# EAGLE board LAN_WIZ_V0.1 (EAGLE 6.4)
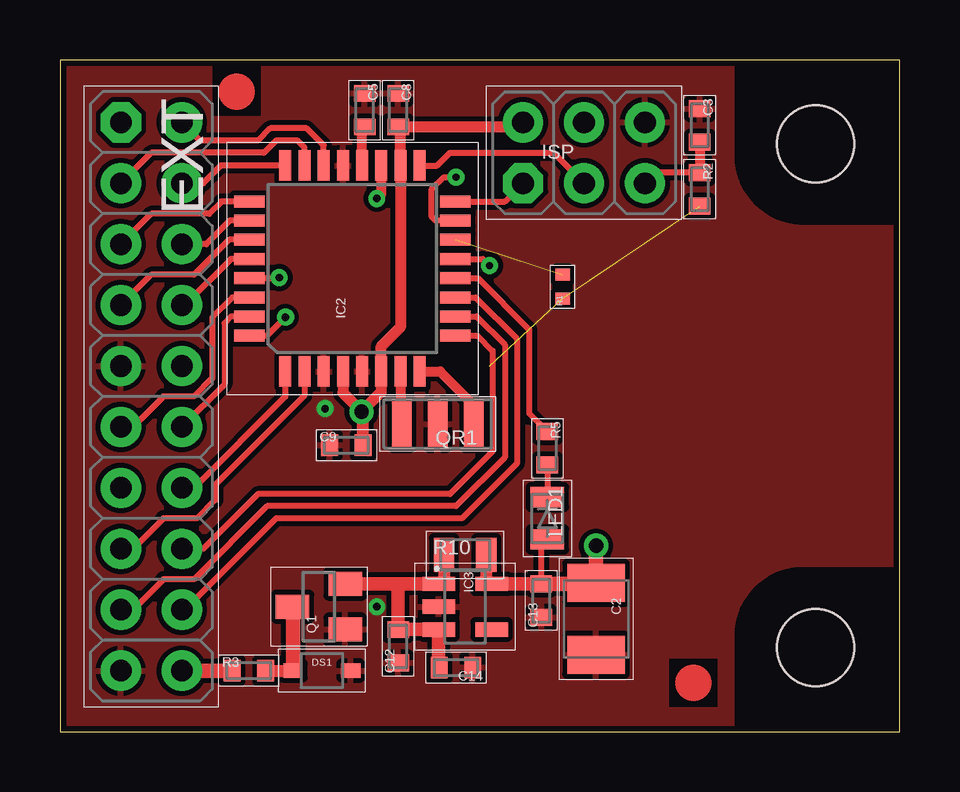
[diagram p0: board, top side]
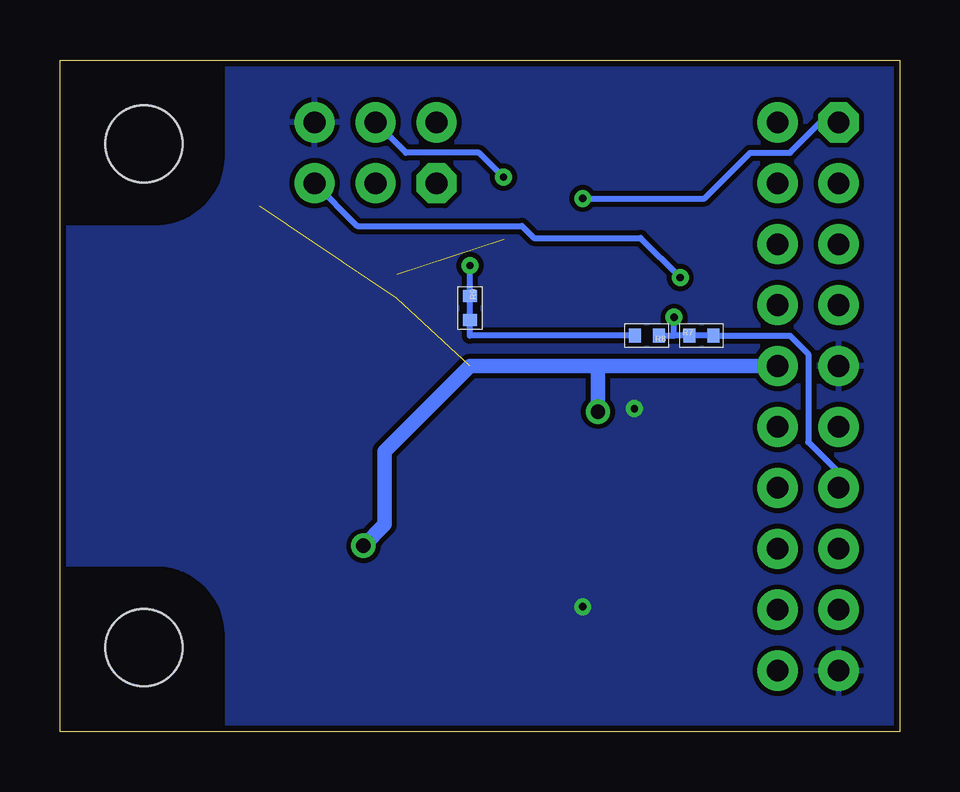
[diagram p1: board, bottom side, seen from below]

Size 35 x 28 mm. Coordinates in mm from the lower left corner, seen from the top.
Outline: 0,0 35,0 35,28 0,28 0,0
Copper layers (1*16): Top 0.035mm / dielectric 1.5mm / Bottom 0.035mm
Design rules "default *": minimum track width 10mil, minimum drill 0.3mm, track to track 8mil, track to pad 8mil, pad to pad 8mil, via to via 8mil, smd to smd 8mil, copper to edge 10mil, drill to drill 8mil, minimum pad ring 5mil, minimum via ring 8mil, stop-mask expansion 4mil, vias tented up to drill 25mil, thermal gap 8mil
Holes 3.2 mm at 31.5,24.5 31.5,3.5

## Footprints (pad centres in the part's own frame; a part is rotated, then mirrored left to right if it is on the bottom)
SMC_B = smd 1.6 x 2.4: + -1.5,0; - 1.5,0
0603 = smd 0.7 x 0.9: 1 -0.697,0; 2 0.697,0
SOD323 = smd 0.8 x 0.6: A 1.2,0; C -1.2,0
ML20S = drill 0.9 pad 1.676 octagon: 1 -11.43,-1.27 | drill 0.9 pad 1.676: 2 -11.43,1.27; 3 -8.89,-1.27; 4 -8.89,1.27; 5 -6.35,-1.27; 6 -6.35,1.27; 7 -3.81,-1.27; 8 -3.81,1.27; 9 -1.27,-1.27; 10 -1.27,1.27; 11 1.27,-1.27; 12 1.27,1.27; 13 3.81,-1.27; 14 3.81,1.27; 15 6.35,-1.27; 16 6.35,1.27; 17 8.89,-1.27; 18 8.89,1.27; 19 11.43,-1.27; 20 11.43,1.27
TQFP32-08 = smd 1.27 x 0.5: 1 -4.293,2.8; 2 -4.293,2; 3 -4.293,1.2; 4 -4.293,0.4; 5 -4.293,-0.4; 6 -4.293,-1.2; 7 -4.293,-2; 8 -4.293,-2.8; 17 4.293,-2.8; 18 4.293,-2; 19 4.293,-1.2; 20 4.293,-0.4; 21 4.293,0.4; 22 4.293,1.2; 23 4.293,2; 24 4.293,2.8 | smd 0.5 x 1.27: 9 -2.8,-4.293; 10 -2,-4.293; 11 -1.2,-4.293; 12 -0.4,-4.293; 13 0.4,-4.293; 14 1.2,-4.293; 15 2,-4.293; 16 2.8,-4.293; 25 2.8,4.293; 26 2,4.293; 27 1.2,4.293; 28 0.4,4.293; 29 -0.4,4.293; 30 -1.2,4.293; 31 -2,4.293; 32 -2.8,4.293
SOT23-5 = smd 0.6 x 1.35: 1 -0.95,-1.101; 2 0,-1.101; 3 0.95,-1.101; 4 0.95,1.101; 5 -0.951,1.101
ML6S = drill 0.9 pad 1.676 octagon: 1 -2.54,-1.27 | drill 0.9 pad 1.676: 2 -2.54,1.27; 3 0,-1.27; 4 0,1.27; 5 2.54,-1.27; 6 2.54,1.27
0805 = smd 0.85 x 1.4: A 0.88,0; C -0.88,0
SOT23 = smd 1 x 1.4: 1 -0.95,-1.1; 2 0.95,-1.1; 3 0,1.1
CR = smd 0.8 x 2: 1 -1.5,0; 2 1.5,0; M 0,0
0402 = smd 0.5 x 0.6: 1 -0.5,0; 2 0.5,0
0805' = smd 0.85 x 1.4: 1 -0.88,0; 2 0.88,0

## Placement (x,y rotation side)
C2  10u  [SMC_B]  22.35,4.7 270 top
C3  100n  [0603]  26.67,25.27 270 top
C5  100n  [0603]  12.7,25.91 270 top
C8  100n  [0603]  14.1,25.91 270 top
C9  100n  [0603]  11.94,11.94 0 top
C12  1u  [0603]  14.1,3.56 90 top
C13  1u  [0603]  20.07,5.46 90 top
C14  100n  [0603]  16.51,2.67 180 top
DS1  PESD12VL1BA  [SOD323]  10.92,2.54 0 top
EXT  EXT  [ML20S]  3.81,13.97 270 top
IC2  MEGA328P-AU  [TQFP32-08]  12.19,19.3 90 top
IC3  LP2992-IM5-3.3  [SOT23-5]  16.89,5.21 270 top
ISP  ISP  [ML6S]  21.84,24.13 0 top
LED1  LEDR  [0805]  20.32,8.89 90 top
Q1  IRLML9301  [SOT23]  10.79,5.21 90 top
QR1  8M  [CR]  15.75,12.83 180 top
R1  10k  [0402]  20.95,18.54 90 top
R2  10k  [0603]  26.67,22.61 270 top
R3  0R  [0603]  7.87,2.54 0 top
R5  330R  [0603]  20.32,11.81 270 top
R7  [0402]  8.26,16.51 0 bottom
R8  [0402]  10.54,16.51 180 bottom
R9  [0402]  17.91,17.65 270 bottom
R10  n.b.  [0805']  16.89,7.37 0 top
U$1  [FUICIDAL1.5]  26.42,2.03 0 top
U$2  [FUICIDAL1.5]  7.37,26.67 0 top

## Library data of the parts
C2 C3 C5 C8 C9 C12-C14 R1-R3 R5 R7-R10 = RCL
DS1 = Diode
EXT ISP = Conn
IC2 = atmel
IC3 = DCDC
LED1 = Optic
Q1 = Transistor
QR1 = QUARTZ
U$1 U$2 = Other

## Nets
+3V3: C2.+ C8.2 C9.2 C13.2 EXT.10 IC2.4 IC2.6 IC2.18 IC3.5 ISP.2 LED1.C R1.1 R2.2 R10.2
GND: C2.- C3.1 C5.1 C8.1 C9.1 C12.1 C13.1 C14.1 DS1.A EXT.9 EXT.19 IC2.3 IC2.5 IC2.21 IC3.2 ISP.6 Q1.1 QR1.M
MISO: IC2.16 ISP.1
MOSI: IC2.15 ISP.4
N$3: EXT.2 IC2.22
N$5: DS1.C Q1.3 R3.2
N$6: C5.2 IC2.20
N$7: IC2.8 QR1.1
N$8: IC2.7 QR1.2
N$9: EXT.20 R3.1
N$10: IC2.12 R5.1
N$11: EXT.13 IC2.32 R7.1 R7.2 R8.1
N$12: C12.2 C14.2 IC3.1 IC3.3 Q1.2 R10.1
N$15: EXT.1 IC2.19
N$21: LED1.A R5.2
PC0: EXT.3 IC2.23
PC1: EXT.4 IC2.24
PC2: EXT.5 IC2.25
PC3: EXT.6 IC2.26
PC4: EXT.7 IC2.27
PC5: EXT.8 IC2.28
PD3: EXT.14 IC2.1
PD4: EXT.15 IC2.2
PD5: EXT.16 IC2.9
PD6: EXT.17 IC2.10
PD7: EXT.18 IC2.11
RIRQ: IC2.13 R8.2 R9.1 R9.2
RSEL: IC2.14 R1.2
RST: C3.2 IC2.29 ISP.5 R2.1
RXD: EXT.11 IC2.30
SCK: IC2.17 ISP.3
TXD: EXT.12 IC2.31

## Tracks (layer width: path | path; a pad name or v marks a point on that pad's centre or on a via)
+3V3  (via drill 0.6)  (2 unrouted)
  Top 0.254: C13.2 20.07,7.76 LED1.C
  Top 0.457: ISP.2 19.11,25.21 C8.2 14.19,25.12 IC2.18 14.19,16.86 13.39,16.06 IC2.6 13.39,14.15 v12.57,13.34 11.79,14.12 IC2.4
  Top 0.508: C9.2 12.63,13.27 v12.57,13.34 | R10.2 17.77,6.38 IC3.5
  Top 0.559: IC3.5 C13.2
  Top 0.61: C13.2 22.31,6.16 C2.+ v22.35,7.75
  Bottom 0.61: 12.57,15.24 17.91,15.24 21.46,11.68 21.46,8.64 v22.35,7.75 | 12.57,15.24 EXT.10 | v12.57,13.34 12.57,15.24
GND  (via drill 0.3)
  other vias: 11.05,13.46 13.21,5.21
  pour Top: 0,0 28,0 28,4 arc-90 31,7 35,7 35,21 31,21 arc-90 28,24 28,28 0,28
  pour Bottom: 0,0 28,0 28,4 arc-90 31,7 35,7 35,21 31,21 arc-90 28,24 28,28 0,28
MISO
  Top 0.254: IC2.16 18.55,22.1 ISP.1
MOSI  (via drill 0.3)
  Top 0.254: IC2.15 15.65,21.3 15.49,21.46 15.49,22.61 16,23.11 v16.51,23.11
  Bottom 0.254: v16.51,23.11 17.53,24.13 20.57,24.13 ISP.4
N$3
  Top 0.254: IC2.22 10.99,24.44 10.29,25.15 8.76,25.15 8.26,24.64 5.84,24.64 EXT.2
N$5
  Top 0.508: R3.2 DS1.C
  Top 0.61: DS1.C 9.72,5.18 Q1.3
N$6
  Top 0.406: IC2.20 12.59,25.1 C5.2
N$7
  Top 0.406: IC2.8 15.85,15.01 17.14,13.72 17.14,12.93 QR1.1
N$8
  Top 0.406: IC2.7 14.19,12.88 QR1.2
N$9
  Top 0.61: EXT.20 R3.1
N$10
  Top 0.254: IC2.12 17.42,18.9 19.56,16.76 19.56,13.27 R5.1
N$11  (via drill 0.3)
  Top 0.254: IC2.32 8.64,16.51 v9.4,17.27
  Top 0.406: IC2.32
  Bottom 0.254: EXT.13 2.54,10.79 3.81,12.06 3.81,15.75 4.57,16.51 R7.2 R7.1 | 8.78,16.51 9.4,16.51 | 9.4,16.51 v9.4,17.27 | R8.1 9.4,16.51
  Bottom 0.406: R7.1 8.78,16.51
N$12
  Top 0.508: R10.1 16.01,6.38 IC3.1
  Top 0.559: IC3.1 14.1,6.16 | 14.1,6.16 Q1.2 | Q1.2 | 14.1,6.16 C12.2 IC3.3 15.79,2.69 C14.2
N$15  (via drill 0.3)
  Top 0.406: IC2.19 13.39,22.41 v13.21,22.23
  Bottom 0.254: v13.21,22.23 8.13,22.23 6.22,24.13 4.57,24.13 3.3,25.4 EXT.1
N$21
  Top 0.254: R5.2 LED1.A
PC0
  Top 0.254: IC2.23 10.19,24.35 9.91,24.64 9.02,24.64 8.51,24.13 3.81,24.13 EXT.3
PC1
  Top 0.254: IC2.24 6.71,23.6 5.97,22.86 EXT.4
PC2
  Top 0.254: IC2.25 6.74,22.1 6.22,21.59 3.81,21.59 EXT.5
PC3
  Top 0.254: IC2.26 7.08,21.3 6.1,20.32 EXT.6
PC4
  Top 0.254: IC2.27 7.04,20.5 5.59,19.05 3.81,19.05 EXT.7
PC5
  Top 0.254: IC2.28 7.13,19.7 5.21,17.78 EXT.8
PD3
  Top 0.254: IC2.1 9.39,13.96 5.59,10.16 EXT.14
PD4
  Top 0.254: EXT.15 3.05,7.62 4.32,8.89 5.71,8.89 6.48,9.65 6.48,10.29 10.19,14 IC2.2
PD5
  Top 0.254: IC2.9 17.41,16.5 18.03,15.88 18.03,11.68 16.26,9.91 8.26,9.91 5.97,7.62 EXT.16
PD6
  Top 0.254: IC2.10 17.37,17.3 18.54,16.13 18.54,11.43 16.51,9.4 8.64,9.4 5.59,6.35 4.32,6.35 3.05,5.08 EXT.17
PD7
  Top 0.254: IC2.11 17.33,18.1 19.05,16.38 19.05,11.18 16.76,8.89 9.02,8.89 5.21,5.08 EXT.18
RIRQ  (via drill 0.3)
  Top 0.254: IC2.13 17.63,19.7 v17.91,19.43
  Bottom 0.254: v17.91,19.43 R9.1 R9.2 17.91,16.51 R8.2
RSEL  (1 unrouted)
RST  (via drill 0.3)
  Top 0.254: R2.1 24.83,23.3 ISP.5 | IC2.29 9.12,18.9 v9.14,18.92
  Top 0.406: C3.2 R2.1
  Bottom 0.254: ISP.5 22.61,21.08 15.75,21.08 15.24,20.57 10.79,20.57 v9.14,18.92
RXD
  Top 0.254: EXT.11 3.05,12.7 4.32,13.97 5.59,13.97 6.35,14.73 6.35,17.27 7.18,18.1 IC2.30
SCK
  Top 0.254: IC2.17 15.72,23.6 16.26,24.13 20.57,24.13 ISP.3
TXD
  Top 0.254: IC2.31 7.14,17.3 6.86,17.02 6.86,14.48 EXT.12